# Allegro board COMPLETE SCHEMATIC V3.brd
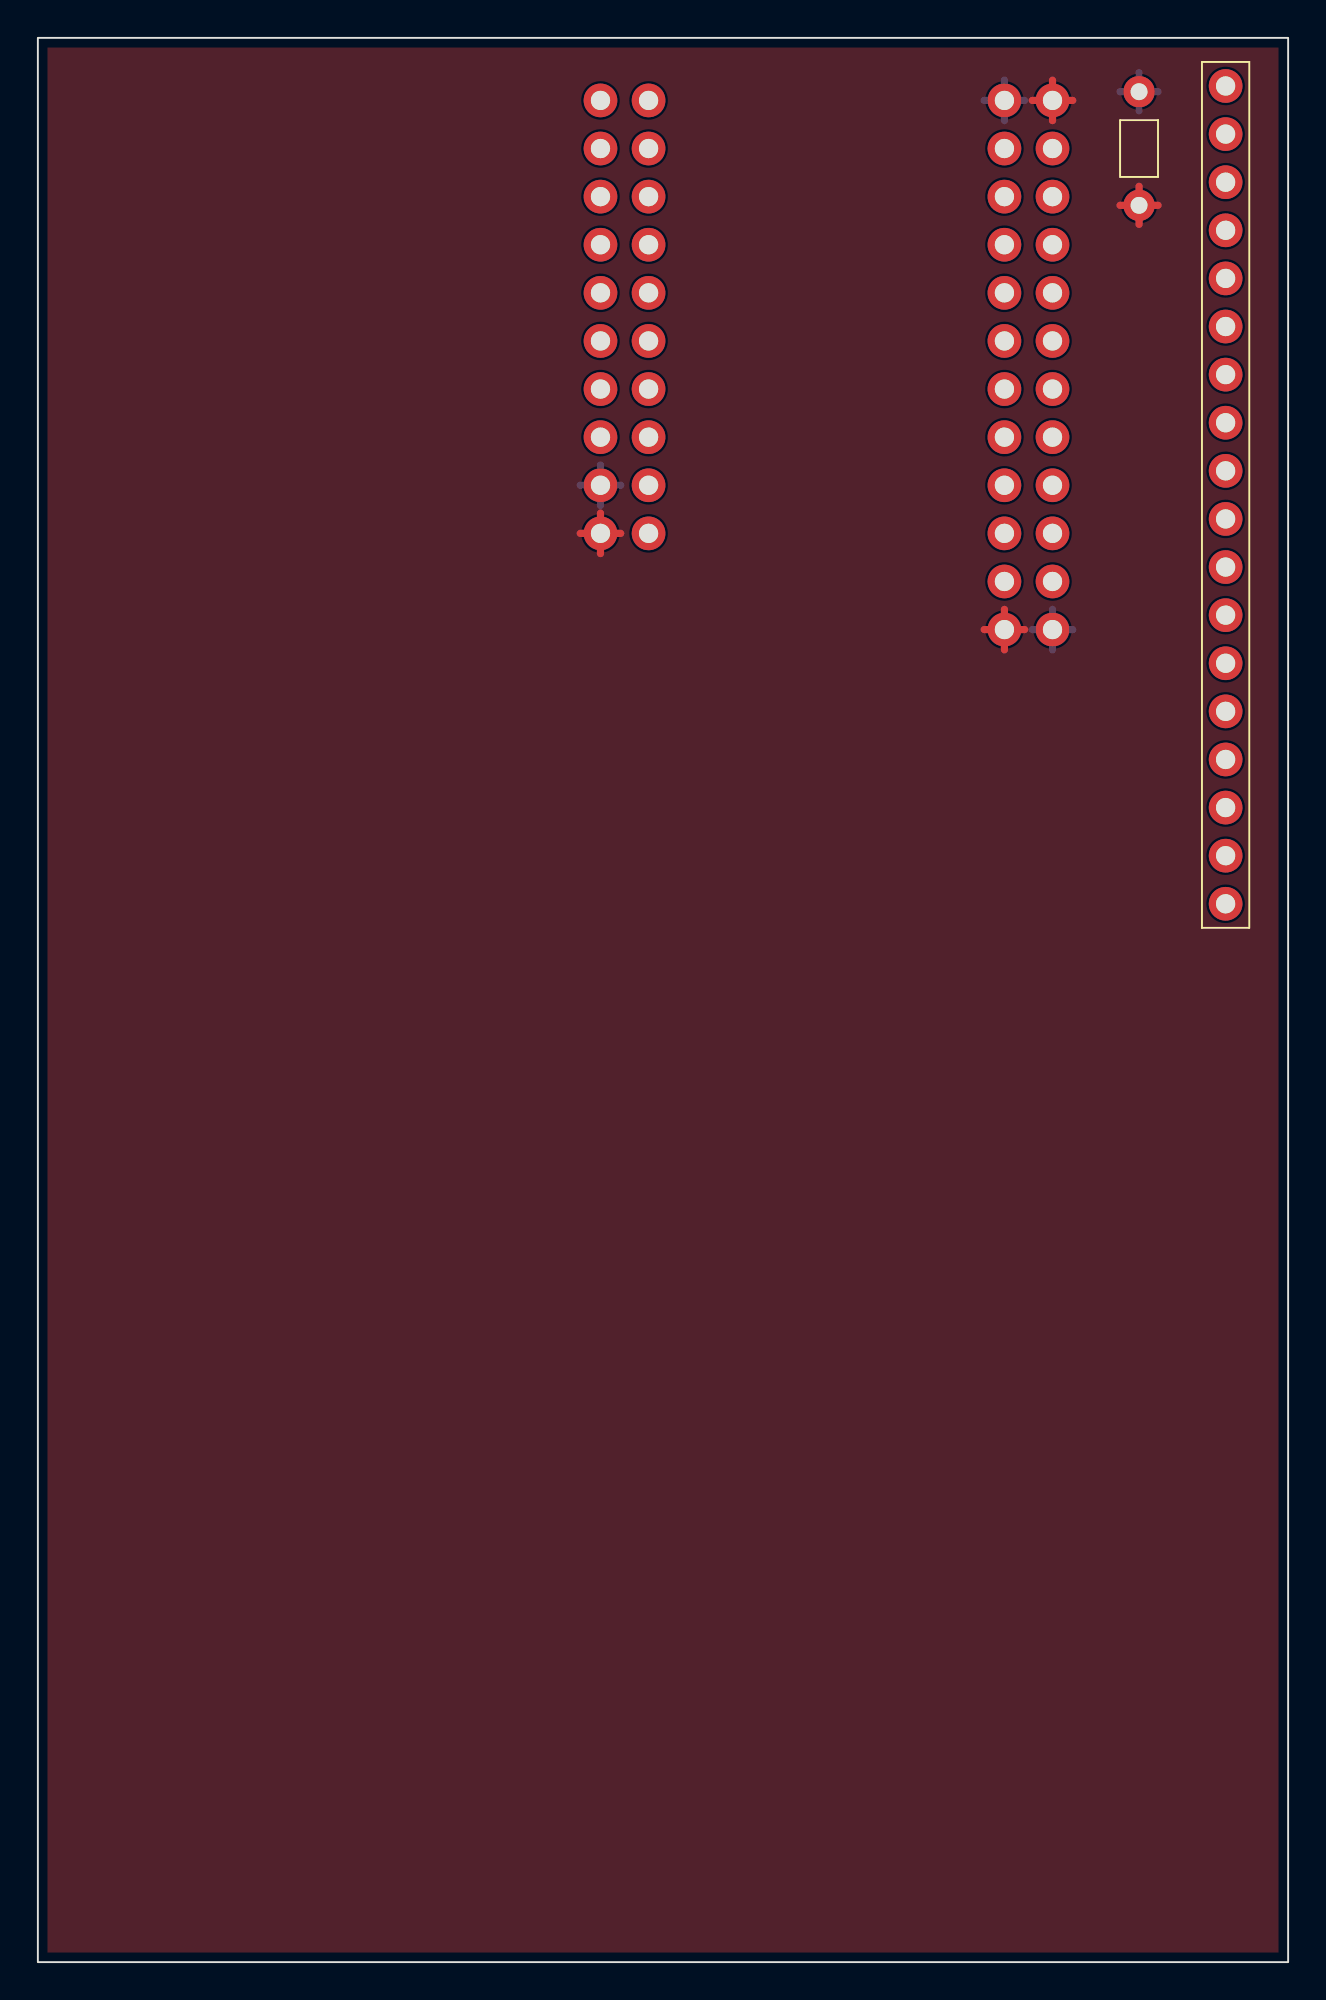
[diagram p0: board, top side]
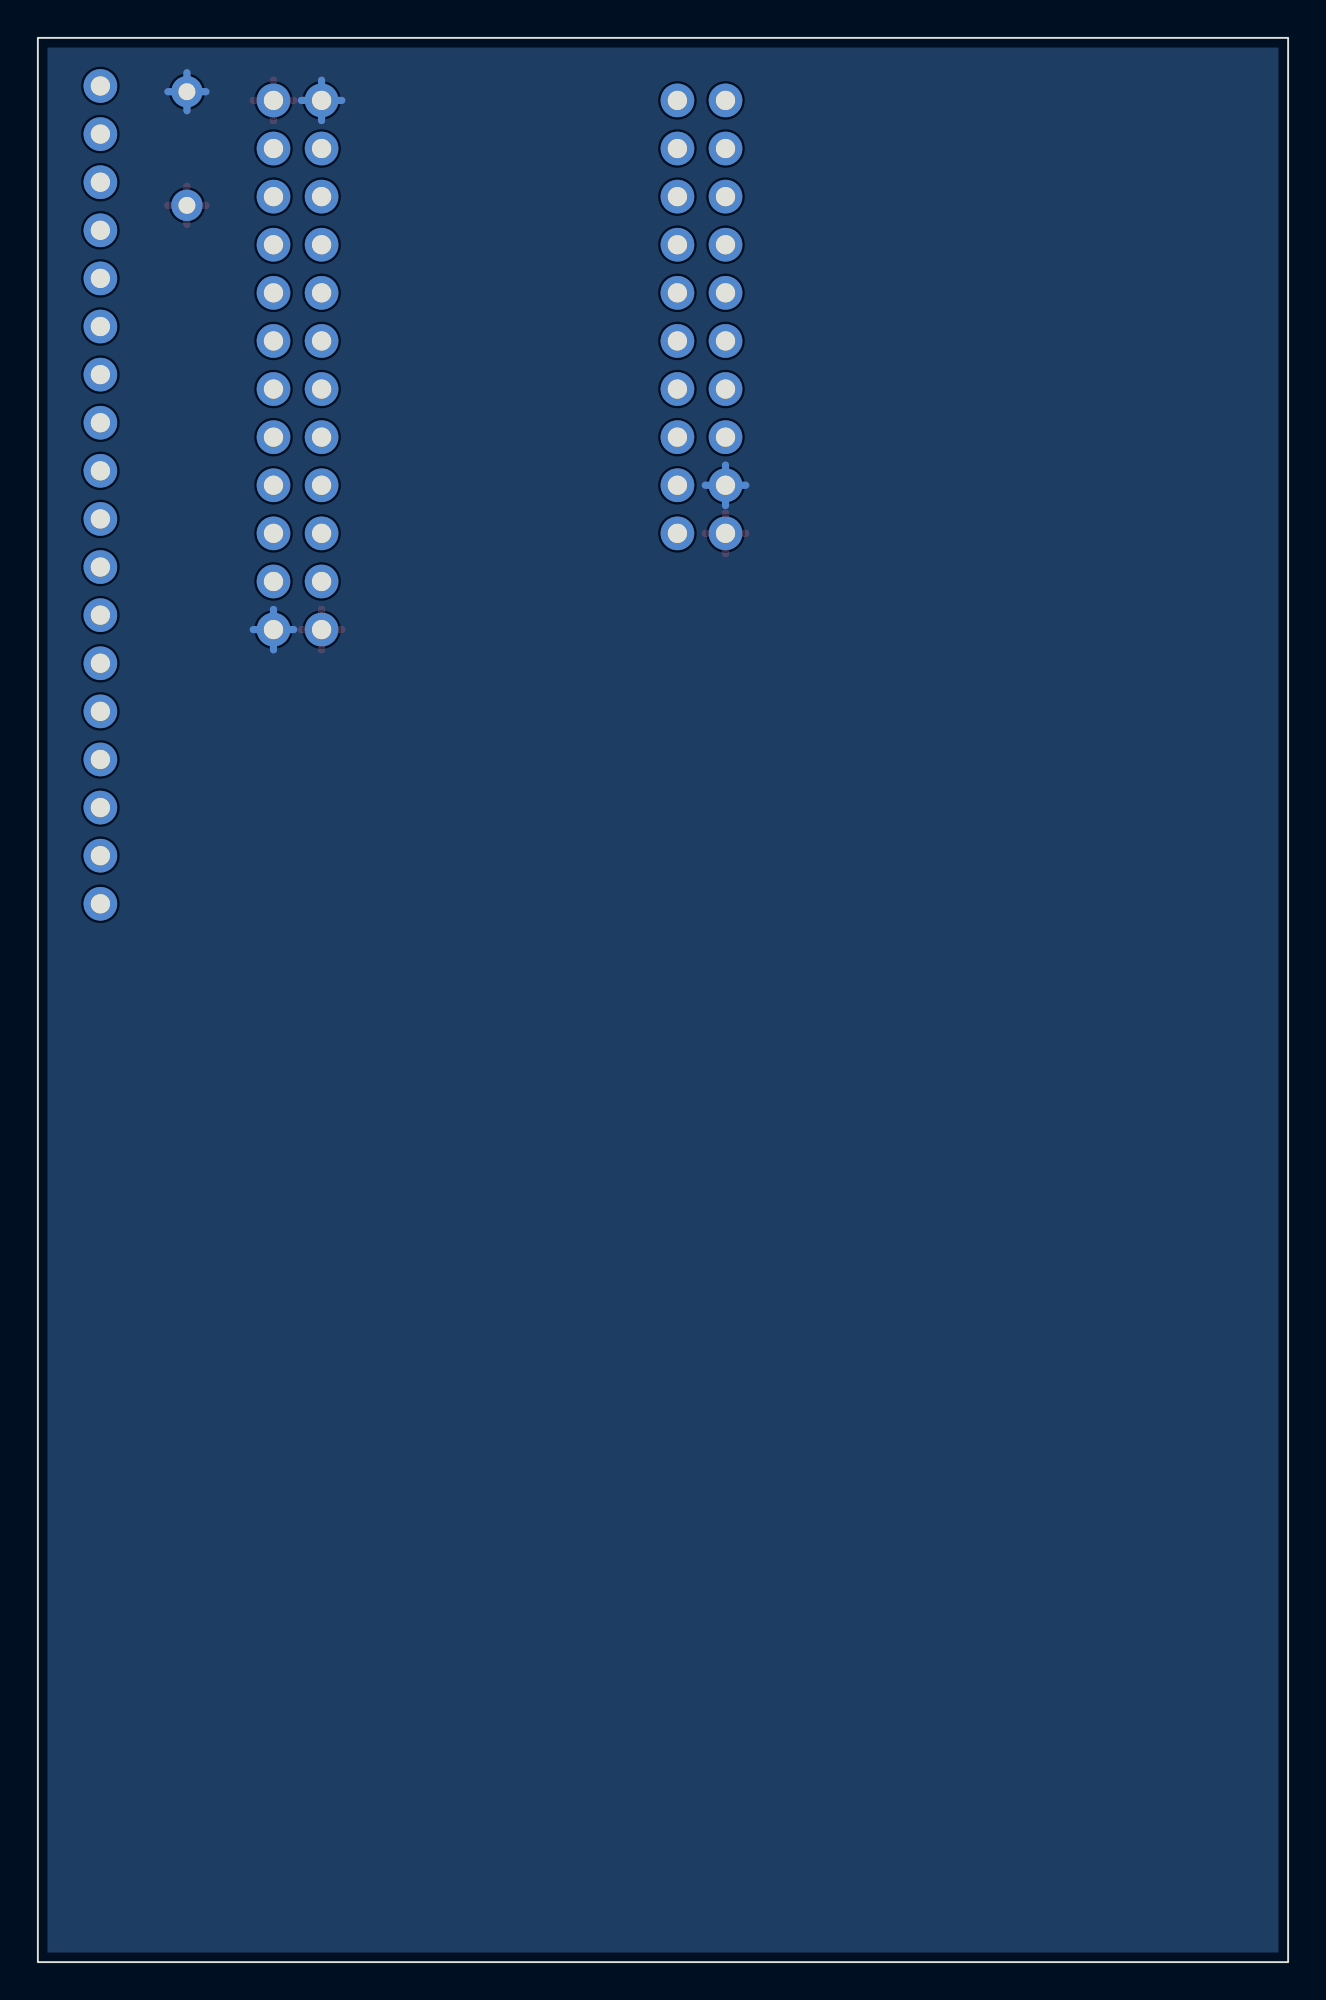
[diagram p1: board, bottom side, seen from below]

Outline 66.04 x 101.6 mm; copper layers: TOP, BOTTOM. Coordinates in mm from the lower left corner of the outline.
Outline path: rectangle 0,0 66.04,101.6

## Placement (name value [footprint] x y rotation side)
C5  0.1 uF 50V  [CAP1]  58.17 95.76 90 top
J2  HEADER 18  [HEADER_18]  62.74 77.47 0 top
U3  PSoC4BLE  [PSOC4BLE]  29.72 98.3 0 top

## Library data of the parts
C5 = CAP NP
J2 = HEADER 18
U3 = PSoC4BLE_0

## Footprints (pads in the part's own frame, mm; a bottom-side part is the same pattern mirrored in y, then rotated)
CAP1
  round 1.651 hole 0.889: 1(-3,0) 2(3,0)
HEADER_18
  round 1.778 hole 1.016: 1(0,21.59) 2(0,19.05) 3(0,16.51) 4(0,13.97) 5(0,11.43) 6(0,8.89) 7(0,6.35) 8(0,3.81) 9(0,1.27) 10(0,-1.27) 11(0,-3.81) 12(0,-6.35) 13(0,-8.89) 14(0,-11.43) 15(0,-13.97) 16(0,-16.51) 17(0,-19.05) 18(0,-21.59)
PSOC4BLE
  round 1.778 hole 1.016: 1(2.54,-22.86) 2(0,-22.86) 3(2.54,-20.32) 4(0,-20.32) 5(2.54,-17.78) 6(0,-17.78) 7(2.54,-15.24) 8(0,-15.24) 9(2.54,-12.7) 10(0,-12.7) 11(2.54,-10.16) 12(0,-10.16) 13(2.54,-7.62) 14(0,-7.62) 15(2.54,-5.08) 16(0,-5.08) 17(2.54,-2.54) 18(0,-2.54) 19(2.54,0) 20(0,0) 21(21.336,0) 22(23.876,0) 23(21.336,-2.54) 24(23.876,-2.54) 25(21.336,-5.08) 26(23.876,-5.08) 27(21.336,-7.62) 28(23.876,-7.62) 29(21.336,-10.16) 30(23.876,-10.16) 31(21.336,-12.7) 32(23.876,-12.7) 33(21.336,-15.24) 34(23.876,-15.24) 35(21.336,-17.78) 36(23.876,-17.78) 37(21.336,-20.32) 38(23.876,-20.32) 39(21.336,-22.86) 40(23.876,-22.86) 41(21.336,-25.4) 42(23.876,-25.4) 43(21.336,-27.94) 44(23.876,-27.94)

## Nets
GND: C5.2 U3.4(GND1) U3.21(GND2) U3.44(GND3)
+5 V: C5.1 U3.2(VDDD) U3.22(VDDA) U3.43(VDDR)
RXD: U3.11(P1.1)
TXD: U3.12(P1.2)
N56918: U3.15(P0.4)
N57246: J2.18 U3.42(P2.1)
N57250: J2.17 U3.41(P2.0)
N57254: J2.16 U3.40(P2.3)
N57258: J2.15 U3.39(P2.2)
N57262: J2.14 U3.38(P2.5)
N57266: J2.13 U3.37(P2.4)
N57270: J2.12 U3.36(P2.7)
N57274: J2.11 U3.35(P2.6)
N57278: J2.10 U3.34(P5.0)
N57282: J2.9 U3.33(P4.1)
N57286: J2.8 U3.32(P5.1)
N57290: J2.7 U3.31(P4.0)
N57294: J2.6 U3.30(P3.1)
N57298: J2.5 U3.29(P3.0)
N57318: J2.4 U3.28(P3.3)
N57322: J2.3 U3.27(P3.2)
N57332: J2.2 U3.26(P3.5)
N57336: J2.1 U3.25(P3.4)

Pads without a net: U3 1 3 5 6 7 8 9 10 13 14 16 17 18 19 20 23 24

## Routing (per net, layer and track width the routed paths; a pad name or vN(x,y) marks a point on that pad's centre or on a via; arc(x,y) is an arc through that point)
GND: length 16.8
  BOTTOM w0.381: 28.65,77.98 U3.4 ; U3.4 29.72,76.91 ; U3.4 30.79,77.98 ; U3.4 29.72,79.05 ; 52.53,70.36 U3.44 ; U3.44 54.66,70.36 ; U3.44 53.59,69.29 ; U3.44 53.59,71.43 ; U3.21 51.05,99.37 ; U3.21 51.05,97.23 ; U3.21 49.99,98.3 ; U3.21 52.12,98.3 ; C5.2 58.17,99.76 ; C5.2 58.17,97.75 ; C5.2 59.17,98.76 ; C5.2 57.16,98.76
+5 V: length 16.8
  TOP w0.381: 52.53,98.3 U3.22 ; U3.22 53.59,99.37 ; U3.22 54.66,98.3 ; U3.22 53.59,97.23 ; 28.65,75.44 U3.2 ; U3.2 29.72,76.51 ; U3.2 30.79,75.44 ; U3.2 29.72,74.37 ; U3.43 51.05,71.43 ; U3.43 49.99,70.36 ; U3.43 52.12,70.36 ; U3.43 51.05,69.29 ; 57.16,92.76 C5.1 ; C5.1 58.17,91.75 ; C5.1 59.17,92.76 ; C5.1 58.17,93.76

## Copper pours and planes (outline as drawn; the poured copper is in the pictures)
GND on BOTTOM: 0.51,0.51 0.51,101.09 65.53,101.09 65.53,0.51
+5 V on TOP: 0.51,0.51 0.51,101.09 65.53,101.09 65.53,0.51
